# EAGLE board current_disc (EAGLE 4.16)
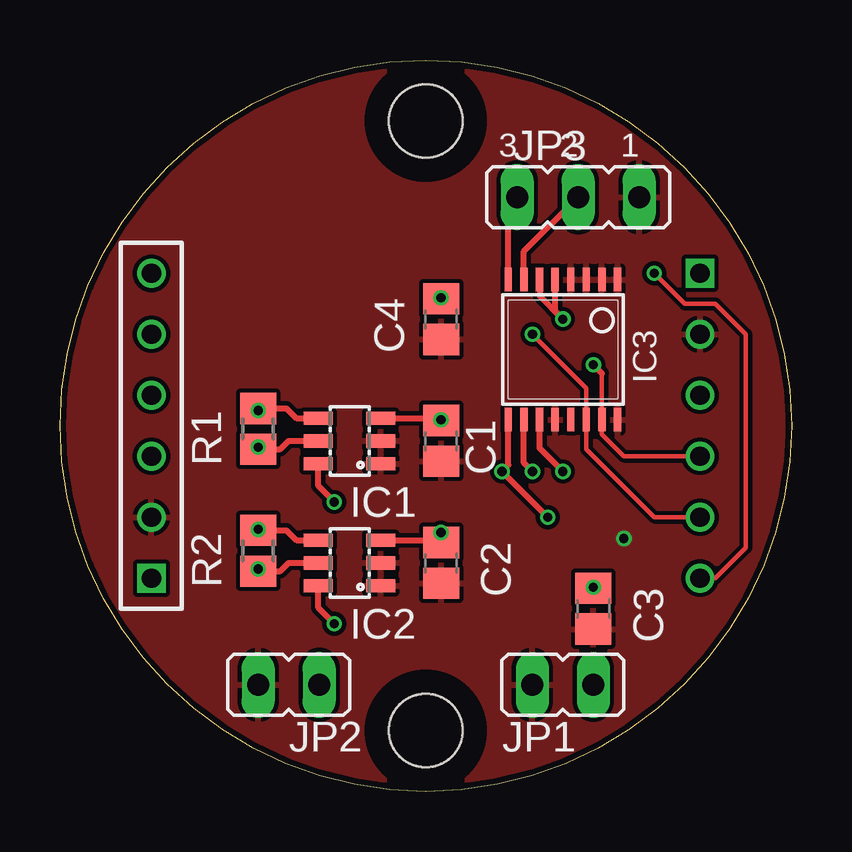
[diagram p0: board, top side]
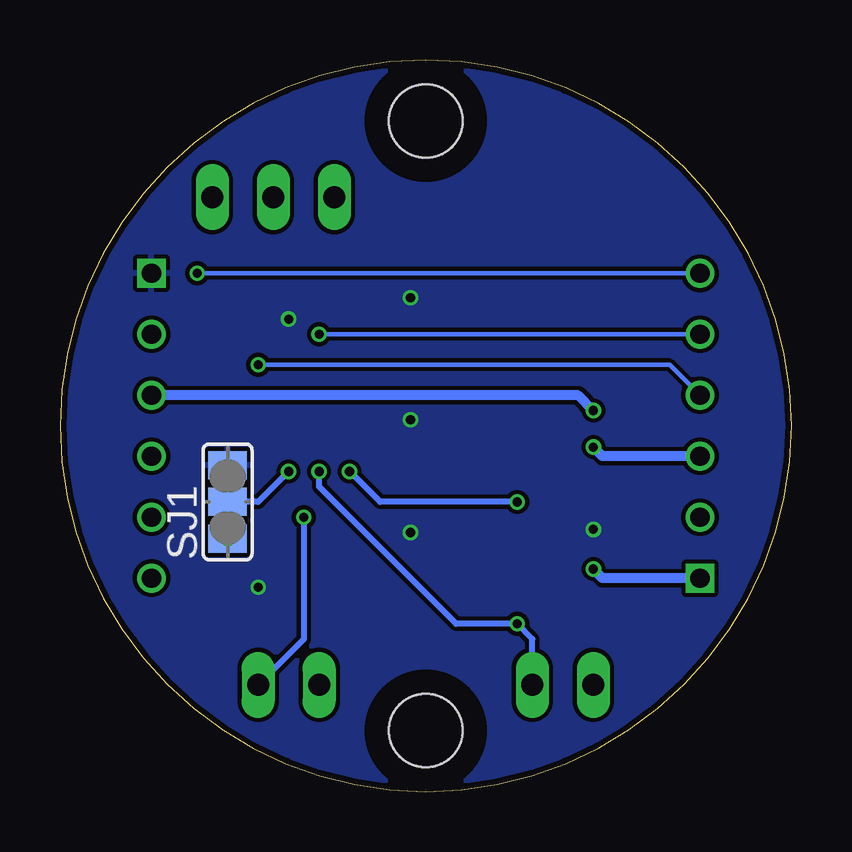
[diagram p1: board, bottom side, seen from below]

Size 30.48 x 30.48 mm. Coordinates in mm from the lower left corner, seen from the top.
Copper layers (1*16): Top 0.035mm / dielectric 1.5748mm / Bottom 0.035mm
Design rules "GoldPhoenix": minimum track width 7mil, minimum drill 15mil, track to track 7mil, track to pad 7mil, pad to pad 7mil, via to via 7mil, smd to smd 0mil, copper to edge 10mil, drill to drill 8mil, minimum pad ring 7mil, minimum via ring 5mil, stop-mask expansion 4mil, vias tented up to drill 0mil, thermal gap 7mil

## Footprints (pad centres in the part's own frame; a part is rotated, then mirrored left to right if it is on the bottom)
C0805 = smd 1.3 x 1.5: 1 -0.85,0; 2 0.85,0
DISC2 = drill 0.8 round: AVCC 11.43,1.27; GND 11.43,3.81; RESET 11.43,-6.35; SCL 11.43,-1.27; SDA 11.43,-3.81 | drill 0.8 square: VCC 11.43,6.35 | hole 3.048: 0,-12.7; 0,12.7
DISC2_CONNECTOR = drill 0.8 round: AVCC 0,1.27; GND 0,3.81; RESET 0,-6.35; SCL 0,-1.27; SDA 0,-3.81 | drill 0.8 square: VCC 0,6.35
SOT23-6L = smd 0.55 x 1.2: 1 -0.95,-1.3; 2 0,-1.3; 3 0.95,-1.3; 4 0.95,1.3; 5 0,1.3; 6 -0.95,1.3
TSSOP16 = smd 0.305 x 0.991: 1 -2.275,-2.918; 2 -1.625,-2.918; 3 -0.975,-2.918; 4 -0.325,-2.918; 5 0.325,-2.918; 6 0.975,-2.918; 7 1.625,-2.918; 8 2.275,-2.918; 9 2.275,2.918; 10 1.625,2.918; 11 0.975,2.918; 12 0.325,2.918; 13 -0.325,2.918; 14 -0.975,2.918; 15 -1.625,2.918; 16 -2.275,2.918
JP1 = drill 0.914 long: 1 0,-1.27; 2 0,1.27
JP2 = drill 0.914 long: 1 -2.54,0; 2 0,0; 3 2.54,0
R0805 = smd 1.3 x 1.5: 1 -0.85,0; 2 0.85,0
SJ_2 = smd 1.168 x 1.6: 1 -1.524,0; 2 0,0; 3 1.524,0

## Placement (x,y rotation side)
C1  [C0805]  15.88,14.6 270 top
C2  [C0805]  15.88,9.52 270 top
C3  [C0805]  22.23,7.62 270 top
C4  [C0805]  15.88,19.68 270 top
CON1  DISC2  [DISC2]  15.24,15.24 0 top
CON2  DISC2_CONNECTOR  [DISC2_CONNECTOR]  3.81,15.24 180 top
IC1  ADM4073  [SOT23-6L]  12.06,14.6 90 top
IC2  ADM4073  [SOT23-6L]  12.06,9.52 90 top
IC3  AD7993  [TSSOP16]  20.95,18.41 180 top
JP1  [JP1]  20.95,4.44 270 top
JP2  [JP1]  9.53,4.44 270 top
JP3  [JP2]  21.59,24.77 180 top
R1  [R0805]  8.26,15.11 270 top
R2  [R0805]  8.26,10.03 270 top
SJ1  [SJ_2]  23.5,12.06 90 bottom

## Library data of the parts
C1-C4 R1 R2 = rcl
CON1 CON2 IC1-IC3 = anton
JP1-JP3 = jumper
SJ1 = SparkFunEagle-6-6-07

## Nets
AN1: IC3.7 JP3.2
AN2: IC3.8 JP3.3
AVCC: CON1.AVCC IC1.4 R1.1
AVCC_P: CON2.AVCC IC1.5 R1.2
CURRENT1: IC1.6 IC3.9 JP1.2
CURRENT2: IC2.6 IC3.10 JP2.2
GND: C1.2 C2.2 C3.2 C4.2 CON1.GND CON2.GND IC1.1 IC1.2 IC2.1 IC2.2 IC3.1 IC3.2 IC3.3 IC3.4 IC3.12 IC3.16 JP1.1 JP2.1 JP3.1 SJ1.1
N$1: IC3.11 SJ1.2
RESET: CON1.RESET CON2.RESET
SCL: CON1.SCL CON2.SCL IC3.15
SDA: CON1.SDA CON2.SDA IC3.14
VCC: C1.1 C2.1 C3.1 C4.1 CON1.VCC IC1.3 IC2.3 IC2.4 IC3.5 IC3.6 R2.1 SJ1.3
VCC_P: CON2.VCC IC2.5 R2.2

## Tracks (layer width: path | path; a pad name or v marks a point on that pad's centre or on a via)
AN1
  Top 0.254: IC3.7 19.33,22.5 JP3.2
AN2
  Top 0.254: IC3.8 18.68,24.39 JP3.3
AVCC  (via drill 0.38)
  Top 0.254: R1.1 9.44,15.96 9.85,15.55 IC1.4
  Top 0.406: R1.1 v8.26,15.87
  Bottom 0.406: CON1.AVCC 8.89,16.51 v8.26,15.87
AVCC_P  (via drill 0.38)
  Top 0.254: R1.2 9.18,14.26 9.53,14.6 IC1.5 10.79,14.6
  Top 0.406: 8.26,14.6 v8.26,14.35 R1.2
  Bottom 0.406: CON2.AVCC 7.87,13.97 v8.26,14.35
CURRENT1  (via drill 0.38)
  Top 0.254: IC1.6 10.77,12.73 v11.43,12.06 | IC3.9 18.68,13.6 v18.41,13.33 v20.32,11.43
  Bottom 0.254: v11.43,12.06 17.14,12.06 v18.41,13.33 | v20.32,11.43 20.32,6.35 JP1.2
CURRENT2  (via drill 0.38)
  Top 0.254: IC2.6 10.77,7.65 v11.43,6.98 | IC3.10 19.33,13.69 v19.68,13.33
  Bottom 0.254: v19.68,13.33 19.68,12.7 13.97,6.98 v11.43,6.98 10.79,6.35 JP2.2
GND  (via drill 0.38)
  other vias: 23.5,10.54
  pour Top: 15.24,30.48 arc-90 30.48,15.24 arc-90 15.24,0 arc-90 0,15.24 arc-90
N$1  (via drill 0.38)
  Top 0.254: IC3.11 19.98,14.31 v20.95,13.33
  Bottom 0.254: v20.95,13.33 22.23,12.06 SJ1.2
RESET  (via drill 0.38)
  Top 0.178: CON1.RESET 27.3,8.89 28.57,10.16 28.57,19.05 27.3,20.32 26.04,20.32 v24.77,21.59
  Bottom 0.178: CON2.RESET v24.77,21.59
SCL  (via drill 0.38)
  Top 0.178: CON1.SCL 23.5,13.97 22.58,14.88 IC3.15 22.58,17.42
  Top 0.254: v22.23,17.78 22.58,17.42
  Bottom 0.178: CON2.SCL 5.08,17.78 v22.23,17.78
SDA  (via drill 0.38)
  Top 0.178: CON1.SDA 24.77,11.43 21.93,14.26 IC3.14 21.93,16.8 v19.68,19.05
  Bottom 0.178: CON2.SDA v19.68,19.05
VCC  (via drill 0.38)
  Top 0.254: C3.1 v22.23,8.51 | C4.1 v15.88,20.57 | 15.88,15.24 C1.1 v15.88,15.49 15.81,15.55 IC1.3 | IC2.4 9.85,10.47 9.44,10.88 R2.1 v8.26,10.92 | IC3.5 20.63,20.01 v20.95,19.68 19.98,20.66 IC3.6 | IC2.3 15.56,10.47 15.88,10.16 C2.1 v15.88,10.79
  Top 0.406: R2.1 8.26,10.79
  pour Bottom: 15.24,30.48 arc-90 30.48,15.24 arc-90 15.24,0 arc-90 0,15.24 arc-90
VCC_P  (via drill 0.38)
  Top 0.254: R2.2 9.18,9.18 9.53,9.52 IC2.5 10.79,9.52
  Top 0.406: v8.26,9.27 R2.2
  Bottom 0.406: CON2.VCC 7.87,8.89 v8.26,9.27